# EAGLE board DHT Board-v.1.1 (EAGLE 8.5.1)
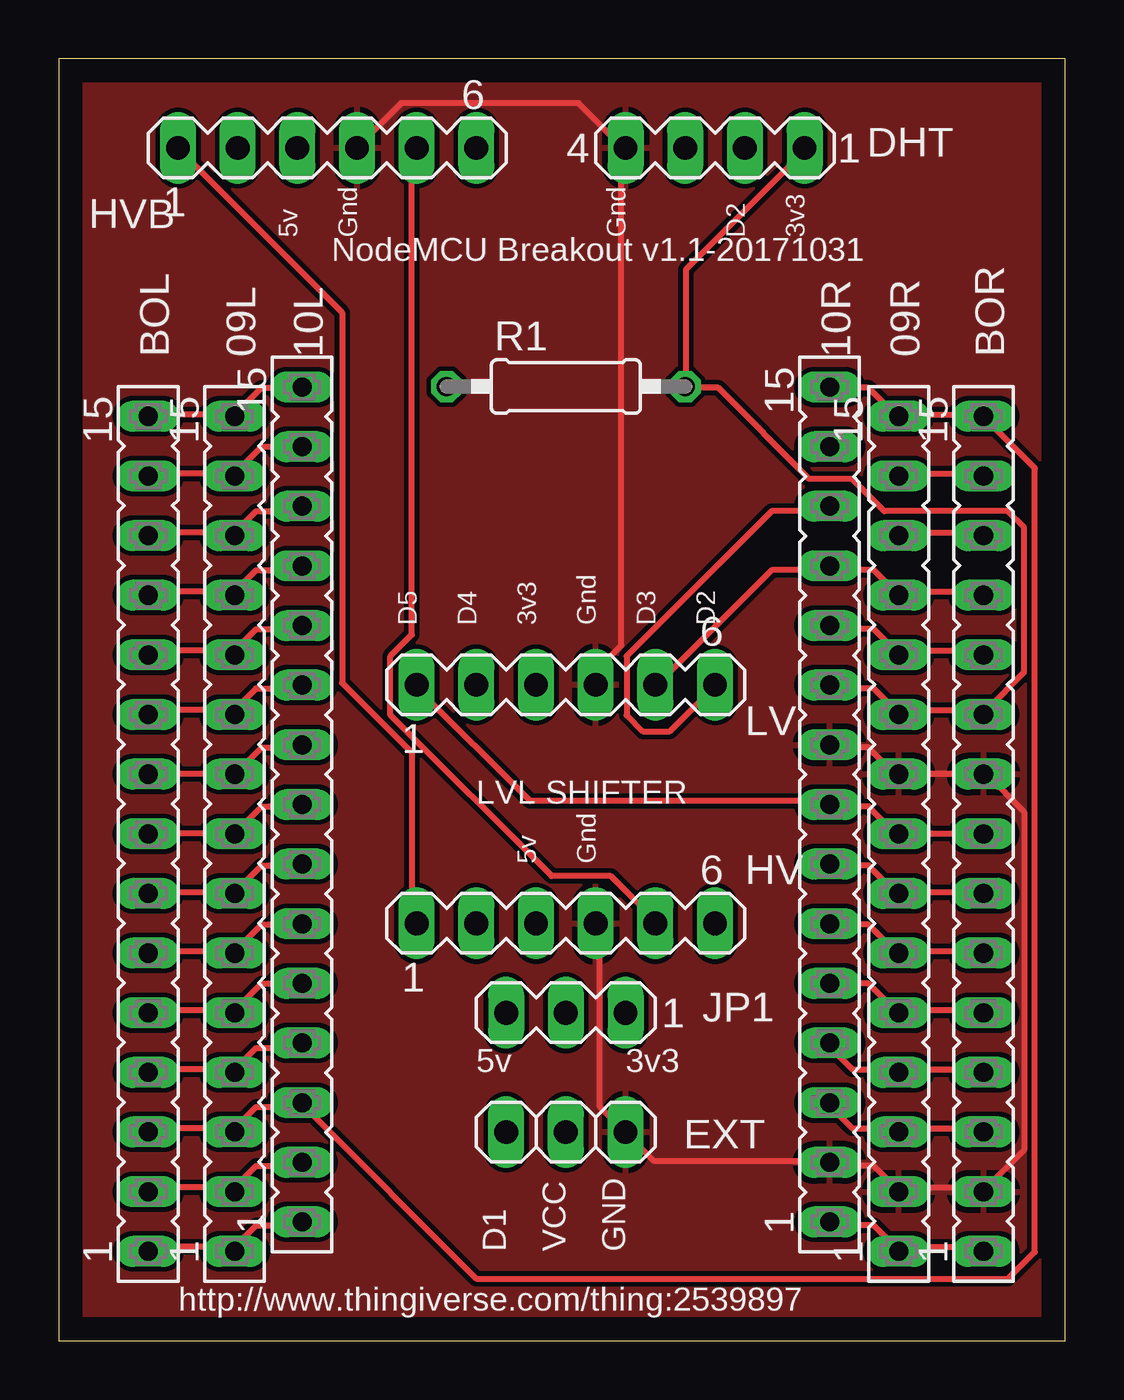
[diagram p0: board, top side]
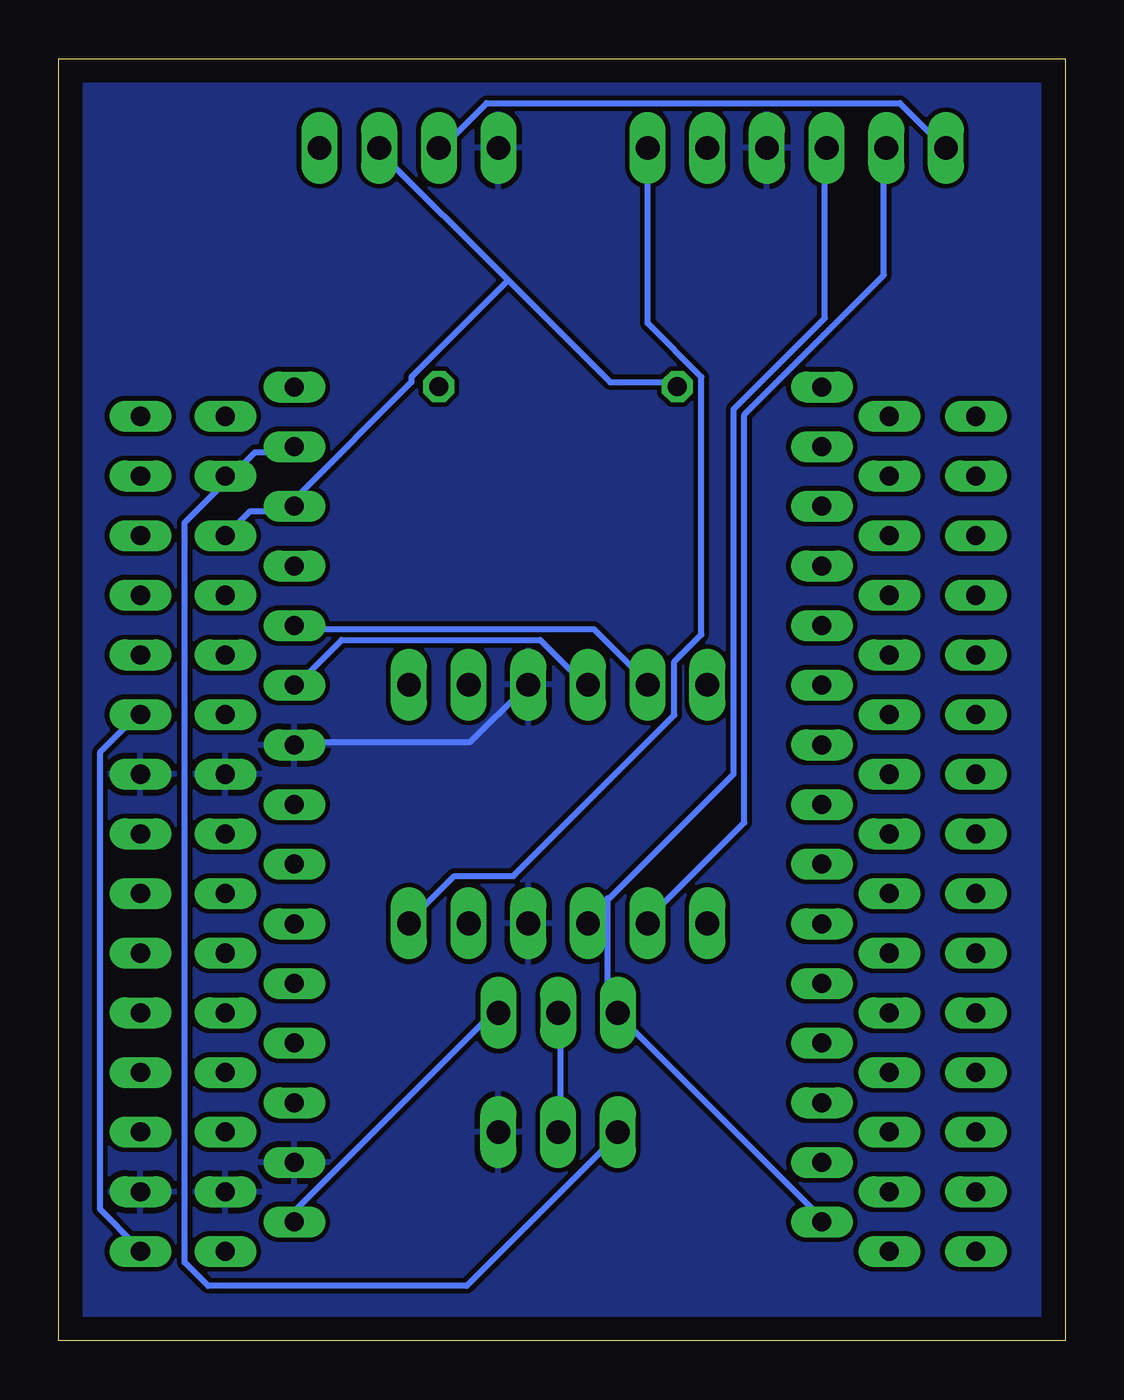
[diagram p1: board, bottom side, seen from below]

Size 42.85 x 54.6 mm. Coordinates in mm from the lower left corner, seen from the top.
Outline: 0,0 42.85,0 42.85,54.6 0,54.6 0,0
Copper layers (1*16): Top 0.035mm / dielectric 1.5mm / Bottom 0.035mm
Design rules "default": minimum track width 10mil, minimum drill 24mil, track to track 8mil, track to pad 8mil, pad to pad 8mil, via to via 8mil, smd to smd 8mil, copper to edge 40mil, drill to drill 8mil, minimum pad ring 10mil, minimum via ring 8mil, stop-mask expansion 4mil, vias tented up to drill 0mil, thermal gap 10mil

## Footprints (pad centres in the part's own frame; a part is rotated, then mirrored left to right if it is on the bottom)
FE15 = drill 0.813 long: 1 -17.78,0; 2 -15.24,0; 3 -12.7,0; 4 -10.16,0; 5 -7.62,0; 6 -5.08,0; 7 -2.54,0; 8 0,0; 9 2.54,0; 10 5.08,0; 11 7.62,0; 12 10.16,0; 13 12.7,0; 14 15.24,0; 15 17.78,0
MA04-1 = drill 1.016 long: 1 -3.81,0; 2 -1.27,0; 3 1.27,0; 4 3.81,0
1X03 = drill 1.016 long: 1 -2.54,0; 2 0,0; 3 2.54,0
MA06-1 = drill 1.016 long: 1 -6.35,0; 2 -3.81,0; 3 -1.27,0; 4 1.27,0; 5 3.81,0; 6 6.35,0
MA03-1 = drill 1.016 long: 1 -2.54,0; 2 0,0; 3 2.54,0
0207/10 = drill 0.813 octagon: 1 -5.08,0; 2 5.08,0

## Placement (x,y rotation side)
09L  15  [FE15]  7.49,21.59 90 top
09R  15  [FE15]  35.76,21.59 90 top
10L  15  [FE15]  10.36,22.84 90 top
10R  15  [FE15]  32.82,22.84 90 top
BOL  15  [FE15]  3.81,21.59 90 top
BOR  15  [FE15]  39.37,21.59 90 top
DHT  [MA04-1]  27.94,50.8 180 top
EXT  [1X03]  21.59,8.89 0 top
HV  [MA06-1]  21.59,17.78 0 top
HVB  6  [MA06-1]  11.43,50.8 0 top
JP1  [MA03-1]  21.59,13.97 180 top
LV  [MA06-1]  21.59,27.94 0 top
R1  10k  [0207/10]  21.59,40.64 0 top

## Library data of the parts
09L 09R 10L 10R BOL BOR = con-lsta; OC_FARNELL: unknown; OC_NEWARK: unknown
DHT HV HVB JP1 LV = con-lstb; OC_FARNELL: unknown; OC_NEWARK: unknown
EXT = pinhead
R1 = resistor

## Nets
3.3V: 09R.1 09R.10 10R.1 10R.10 BOR.1 BOR.10 DHT.1 JP1.1 LV.3 R1.2
3.3V2: 09L.5 10L.5 BOL.5
5V: 09L.1 10L.1 BOL.1 HV.3 HVB.3 JP1.3
A0: 09L.15 10L.15 BOL.15
CLK: 09L.7 10L.7 BOL.7
CMD: 09L.9 10L.9 BOL.9
D0: 09L.3 09R.15 10L.3 10R.15 BOL.3 BOR.15
D1: 09R.14 10R.14 BOR.14 EXT.1
D2: 09R.13 10R.13 BOR.13 DHT.2 LV.6 R1.1
D3: 09R.12 10R.12 BOR.12 LV.5
D4: 09R.11 10R.11 BOR.11 LV.2
D5: 09R.8 10R.8 BOR.8 LV.1
D6: 09R.7 10R.7 BOR.7
D7: 09R.6 10R.6 BOR.6
D8: 09R.5 10R.5 BOR.5
D9: 09R.4 10R.4 BOR.4
D10: 09R.3 10R.3 BOR.3
EN: 09L.4 10L.4 BOL.4
GND: 09R.2 09R.9 10R.2 10R.9 BOR.2 BOR.9 DHT.4 EXT.3 HV.4 HVB.4 LV.4
GND1: 09L.2 10L.2 BOL.2
GND2: 09L.6 10L.6 BOL.6
N$10: 09L.14 10L.14 BOL.14
N$11: 09L.13 10L.13 BOL.13
N$32: DHT.3 HV.1 HVB.1
N$33: HV.2 HVB.2
N$34: HV.5 HVB.5
N$35: HV.6 HVB.6
SD0: 09L.8 10L.8 BOL.8
SD1: 09L.10 10L.10 BOL.10
SD2: 09L.11 10L.11 BOL.11
SD3: 09L.12 10L.12 BOL.12
VCC: EXT.2 JP1.2

## Tracks (layer width: path | path; a pad name or v marks a point on that pad's centre or on a via)
3.3V
  Top 0.254: 10R.1 32.87,4.93 34.7,4.93 35.61,4.01 09R.1 35.84,4.01 39.27,4.01 BOR.1 | DHT.1 31.72,50.65 26.69,45.62 26.69,40.82 R1.2 26.69,40.59 28.07,40.59 31.95,36.7 33.78,36.7 35.15,35.33 40.41,35.33 41.1,34.65 41.1,28.47 39.5,26.87 BOR.10 39.27,26.87 35.84,26.87 09R.10 35.61,26.87 34.7,27.79 32.87,27.79 10R.10
  Bottom 0.254: LV.3 20.52,28.02 22.35,29.85 30.81,29.85 32.64,28.02 10R.10 | BOR.1 39.5,4.01 41.1,5.61 41.1,25.04 39.5,26.64 BOR.10 | JP1.1 24.49,13.84 32.99,5.34 10R.1
3.3V2
  Top 0.254: BOL.5 3.83,14.07 7.26,14.07 09L.5 7.49,14.07 8.64,15.21 10.24,15.21 10L.5
5V
  Top 0.254: BOL.1 3.83,4.01 7.26,4.01 09L.1 7.49,4.01 8.41,4.93 10.24,4.93 10L.1
  Bottom 0.254: 20.29,17.73 HV.3 20.29,17.96 19.45,18.8 | 10.46,5.16 10L.1 10.49,5.34 18.99,13.84 JP1.3 19.49,14.34 19.49,18.84 19.45,18.8 | 19.45,18.8 14.12,24.13 14.12,39.67 10.24,43.56 10.24,50.65 HVB.3
A0
  Top 0.254: BOL.15 3.83,39.45 7.26,39.45 09L.15 7.49,39.45 8.64,40.59 10.24,40.59 10L.15
CLK
  Top 0.254: BOL.7 3.83,19.1 7.26,19.1 09L.7 7.49,19.1 8.64,20.24 10.24,20.24 10L.7
CMD
  Top 0.254: BOL.9 09L.9 8.64,25.27 10.24,25.27 10L.9
D0
  Top 0.254: 10R.15 32.87,40.59 34.47,40.59 35.61,39.45 09R.15 35.84,39.45 39.27,39.45 BOR.15 39.5,39.22 41.55,37.16 41.55,3.79 40.41,2.64 17.78,2.64 10.46,9.96 10L.3 10.24,9.96 8.41,9.96 7.49,9.04 09L.3 7.26,9.04 3.83,9.04 BOL.3
D1
  Top 0.254: BOR.14 39.27,36.93 35.84,36.93 09R.14
  Bottom 0.254: 19.15,9.04 EXT.1 18.99,8.84 25.49,2.34 36.49,2.34 37.49,3.34 37.49,34.84 35.99,36.34 09R.14 35.49,36.84 34.49,37.84 32.99,37.84 10R.14
D2
  Top 0.254: BOR.13 39.27,34.42 35.84,34.42 09R.13 | LV.6 27.84,27.79 26.01,25.96 24.87,25.96 24.18,26.64 24.18,29.16 30.35,35.33 32.64,35.33 10R.13
  Bottom 0.254: 09R.13 35.61,34.42 34.7,35.33 32.87,35.33 10R.13 32.64,35.56 32.64,36.02 27.84,40.82 27.84,41.05 23.72,45.16 | 23.72,45.16 29.21,50.65 DHT.2 | 23.72,45.16 19.38,40.82 16.64,40.82 R1.1
D3
  Top 0.254: BOR.12 39.27,31.9 35.84,31.9 09R.12 35.61,31.9 34.7,32.82 32.87,32.82 10R.12 32.64,32.82 30.35,32.82 25.55,28.02 LV.5
D4
  Top 0.254: 10R.11 32.87,30.3 34.7,30.3 35.61,29.39 09R.11 35.84,29.39 39.27,29.39 BOR.11
  Bottom 0.254: LV.2 17.78,28.02 20.07,30.3 32.64,30.3 10R.11
D5
  Top 0.254: BOR.8 39.27,21.61 35.84,21.61 09R.8 35.61,21.61 34.47,22.76 32.87,22.76 10R.8 32.64,22.99 20.07,22.99 15.26,27.79 LV.1
D6
  Top 0.254: BOR.7 39.27,19.1 35.84,19.1 09R.7 35.61,19.1 34.47,20.24 32.87,20.24 10R.7
D7
  Top 0.254: BOR.6 39.27,16.59 35.84,16.59 09R.6 35.61,16.59 34.47,17.73 32.87,17.73 10R.6
D8
  Top 0.254: BOR.5 39.27,14.07 35.84,14.07 09R.5 35.61,14.07 34.47,15.21 32.87,15.21 10R.5
D9
  Top 0.254: 10R.4 32.87,12.47 33.78,11.56 35.61,11.56 09R.4 35.84,11.56 39.27,11.56 BOR.4
D10
  Top 0.254: 10R.3 32.87,9.96 33.78,9.04 35.61,9.04 09R.3 35.84,9.04 39.27,9.04 BOR.3
EN
  Top 0.254: BOL.4 3.83,11.56 7.26,11.56 09L.4 7.49,11.56 8.41,12.47 10.24,12.47 10L.4
GND
  Top 0.254: HV.4 23.04,17.73 23.04,9.96 23.95,9.04 EXT.3 24.18,8.81 25.32,7.67 32.64,7.67 10R.2 32.87,7.44 34.7,7.44 35.61,6.53 09R.2 35.84,6.53 39.27,6.53 BOR.2 39.5,6.53 41.1,8.13 41.1,22.53 39.5,24.13 BOR.9 09R.9 35.61,24.13 34.47,25.27 32.87,25.27 10R.9 | HVB.4 12.75,50.88 14.58,52.7 22.12,52.7 23.95,50.88 DHT.4 23.95,50.65 23.95,29.62 23.04,28.7 23.04,28.02 LV.4
  Bottom 0.254: LV.4 23.04,27.79 25.32,25.5 32.64,25.5 10R.9
  pour Top: 0,0 0,54.61 43.18,54.61 43.18,0
  pour Bottom: 0,0 0,54.61 43.18,54.61 43.18,0
GND1
  Top 0.254: BOL.2 3.83,6.53 7.26,6.53 09L.2 7.49,6.53 8.41,7.44 10.24,7.44 10L.2
GND2
  Top 0.254: BOL.6 3.83,16.59 7.26,16.59 09L.6 7.49,16.59 8.64,17.73 10.24,17.73 10L.6
N$10
  Top 0.254: BOL.14 3.83,36.93 7.26,36.93 09L.14 7.49,36.93 8.64,38.08 10.24,38.08 10L.14
N$11
  Top 0.254: BOL.13 3.83,34.42 7.26,34.42 09L.13 7.49,34.42 8.41,35.33 10.24,35.33 10L.13
N$32
  Top 0.254: HV.1 15.04,17.96 15.04,25.04 12.06,28.02 12.06,43.79 5.21,50.65 HVB.1
  Bottom 0.254: HVB.1 5.21,50.88 7.04,52.7 24.64,52.7 26.47,50.88 DHT.3
N$33
  Bottom 0.254: HVB.2 7.72,50.65 7.72,45.39 13.66,39.45 13.66,22.07 17.78,17.96 HV.2
N$34
  Top 0.254: HVB.5 15.04,50.65 15.04,30.07 14.12,29.16 14.12,26.64 20.98,19.79 23.5,19.79 25.32,17.96 HV.5
N$35
  Bottom 0.254: HVB.6 17.78,43.33 15.49,41.05 15.49,30.07 16.64,28.93 16.64,26.64 23.5,19.79 26.01,19.79 27.84,17.96 HV.6
SD0
  Top 0.254: BOL.8 3.83,21.61 7.26,21.61 09L.8 7.49,21.61 8.64,22.76 10.24,22.76 10L.8
SD1
  Top 0.254: BOL.10 3.83,26.87 7.26,26.87 09L.10 7.49,26.87 8.41,27.79 10.24,27.79 10L.10
SD2
  Top 0.254: BOL.11 3.83,29.39 7.26,29.39 09L.11 7.49,29.39 8.41,30.3 10.24,30.3 10L.11
SD3
  Top 0.254: BOL.12 3.83,31.9 7.26,31.9 09L.12 7.49,31.9 8.41,32.82 10.24,32.82 10L.12
VCC
  Bottom 0.254: EXT.2 21.49,9.34 21.49,13.84 JP1.2

## Text on the board
tNames: 5v | Gnd | Gnd | D2 | 3v3 | NodeMCU Breakout v1.1-20171031 | D5 | D4 | 3v3 | Gnd | D3 | D2 | LVL SHIFTER | 5v | Gnd | 5v | 3v3 | D1 | VCC | GND | http://www.thingiverse.com/thing:2539897